# EAGLE board power supply1 (EAGLE 6.5.0)
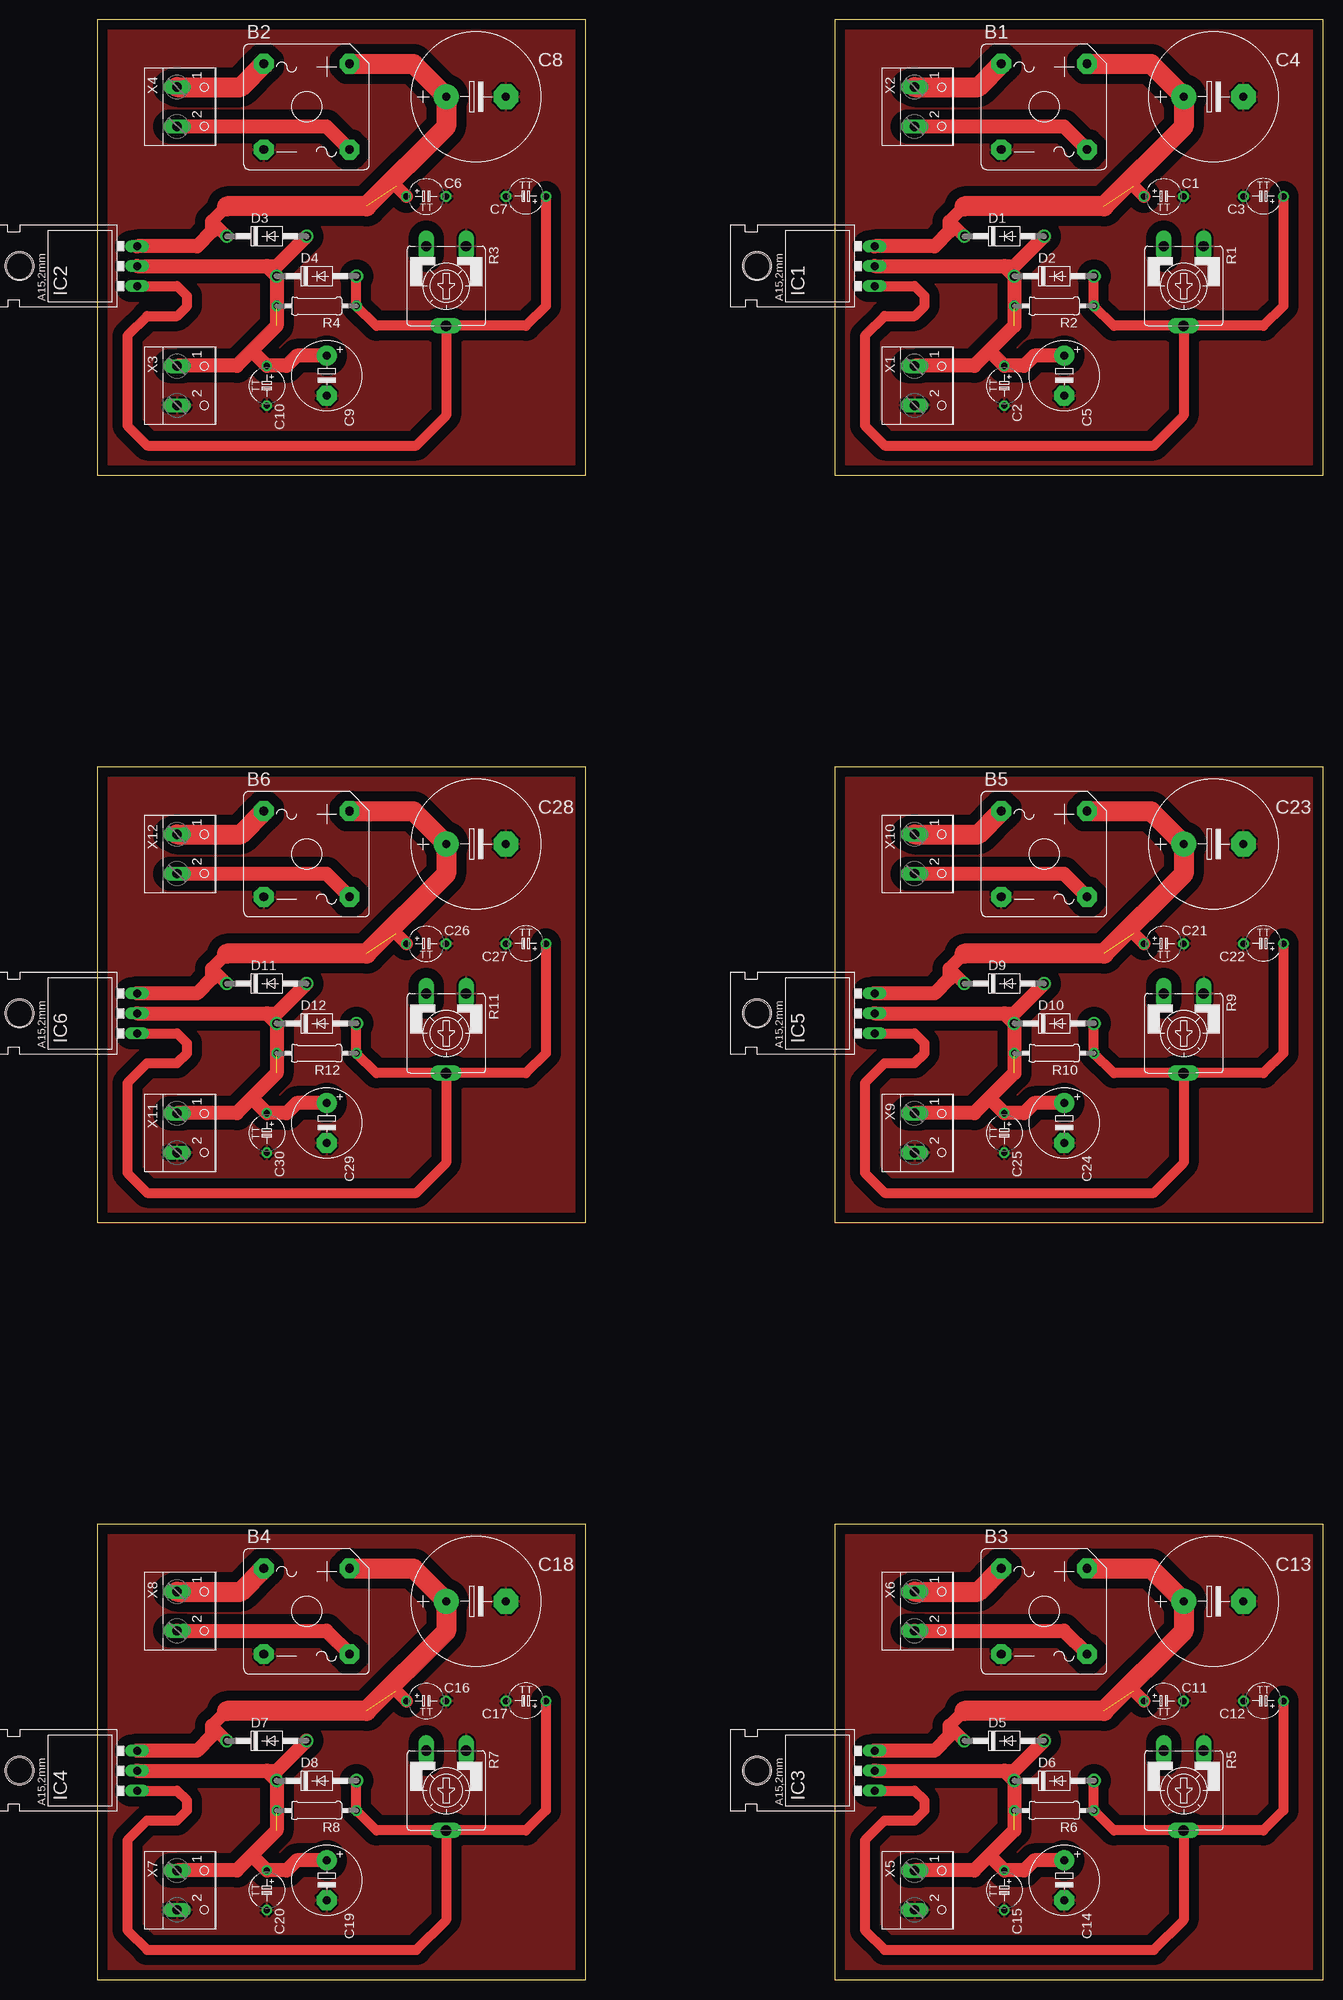
[diagram p0: board, top side]

Size 156.19 x 249.86 mm. Coordinates in mm from the lower left corner, seen from the top.
Outline: 93.98,191.77 156.19,191.77 156.19,249.86 93.98,249.86 93.98,191.77
Outline: 0,191.77 62.21,191.77 62.21,249.86 0,249.86 0,191.77
Outline: 93.98,0 156.19,0 156.19,58.09 93.98,58.09 93.98,0
Outline: 0,0 62.21,0 62.21,58.09 0,58.09 0,0
Outline: 93.98,96.52 156.19,96.52 156.19,154.61 93.98,154.61 93.98,96.52
Outline: 0,96.52 62.21,96.52 62.21,154.61 0,154.61 0,96.52
Copper layers (1*16): Top 0.035mm / dielectric 1.5mm / Bottom 0.035mm
Design rules "default": minimum track width 10mil, minimum drill 24mil, track to track 8mil, track to pad 8mil, pad to pad 8mil, via to via 8mil, smd to smd 8mil, copper to edge 40mil, drill to drill 8mil, minimum pad ring 10mil, minimum via ring 8mil, stop-mask expansion 4mil, vias tented up to drill 0mil, thermal gap 10mil

## Footprints (pad centres in the part's own frame; a part is rotated, then mirrored left to right if it is on the bottom)
GBPC1 = drill 1.118 pad 2.54 octagon: + 5.461,5.461; - -5.461,-5.461; AC1 -5.461,5.461; AC2 5.461,-5.461
TAP5-45 = drill 0.813: + -2.54,0 | drill 0.813 octagon: - 2.54,0
E7,5-16 = drill 1.016 pad 3.15: + -3.81,0 | drill 1.016 pad 3.15 octagon: - 3.81,0
E5-8,5 = drill 1.016 pad 2.54: + -2.54,0 | drill 1.016 pad 2.54 octagon: - 2.54,0
DO41-10 = drill 1.118: A 5.08,0; C -5.08,0
TO220L1 = drill 1.016 long: 1 -2.54,-3.81; 2 0,-3.81; 3 2.54,-3.81 | hole 3.302: 0,11.176
CA9V = drill 1.321 long: A -2.54,-5.08; E 2.54,-5.08; S 0,5.08
0207/10 = drill 0.813 octagon: 1 -5.08,0; 2 5.08,0
W237-102 = drill 1.194 long: 1 -2.5,-1.27; 2 2.5,-1.27

## Placement (x,y rotation side)
B1  [GBPC1]  120.65,238.76 0 top
B2  [GBPC1]  26.67,238.76 0 top
B3  [GBPC1]  120.65,46.99 0 top
B4  [GBPC1]  26.67,46.99 0 top
B5  [GBPC1]  120.65,143.51 0 top
B6  [GBPC1]  26.67,143.51 0 top
C1  0.1uF  [TAP5-45]  135.89,227.33 0 top
C2  0.1uF  [TAP5-45]  115.57,203.2 270 top
C3  0.1uF  [TAP5-45]  148.59,227.33 180 top
C4  [E7,5-16]  142.24,240.03 0 top
C5  [E5-8,5]  123.19,204.47 270 top
C6  0.1uF  [TAP5-45]  41.91,227.33 0 top
C7  0.1uF  [TAP5-45]  54.61,227.33 180 top
C8  [E7,5-16]  48.26,240.03 0 top
C9  [E5-8,5]  29.21,204.47 270 top
C10  0.1uF  [TAP5-45]  21.59,203.2 270 top
C11  0.1uF  [TAP5-45]  135.89,35.56 0 top
C12  0.1uF  [TAP5-45]  148.59,35.56 180 top
C13  [E7,5-16]  142.24,48.26 0 top
C14  [E5-8,5]  123.19,12.7 270 top
C15  0.1uF  [TAP5-45]  115.57,11.43 270 top
C16  0.1uF  [TAP5-45]  41.91,35.56 0 top
C17  0.1uF  [TAP5-45]  54.61,35.56 180 top
C18  [E7,5-16]  48.26,48.26 0 top
C19  [E5-8,5]  29.21,12.7 270 top
C20  0.1uF  [TAP5-45]  21.59,11.43 270 top
C21  0.1uF  [TAP5-45]  135.89,132.08 0 top
C22  0.1uF  [TAP5-45]  148.59,132.08 180 top
C23  [E7,5-16]  142.24,144.78 0 top
C24  [E5-8,5]  123.19,109.22 270 top
C25  0.1uF  [TAP5-45]  115.57,107.95 270 top
C26  0.1uF  [TAP5-45]  41.91,132.08 0 top
C27  0.1uF  [TAP5-45]  54.61,132.08 180 top
C28  [E7,5-16]  48.26,144.78 0 top
C29  [E5-8,5]  29.21,109.22 270 top
C30  0.1uF  [TAP5-45]  21.59,107.95 270 top
D1  1N4004  [DO41-10]  115.57,222.25 0 top
D2  1N4004  [DO41-10]  121.92,217.17 0 top
D3  1N4004  [DO41-10]  21.59,222.25 0 top
D4  1N4004  [DO41-10]  27.94,217.17 0 top
D5  1N4004  [DO41-10]  115.57,30.48 0 top
D6  1N4004  [DO41-10]  121.92,25.4 0 top
D7  1N4004  [DO41-10]  21.59,30.48 0 top
D8  1N4004  [DO41-10]  27.94,25.4 0 top
D9  1N4004  [DO41-10]  115.57,127 0 top
D10  1N4004  [DO41-10]  121.92,121.92 0 top
D11  1N4004  [DO41-10]  21.59,127 0 top
D12  1N4004  [DO41-10]  27.94,121.92 0 top
IC1  LM317MBT  [TO220L1]  95.25,218.44 90 top
IC2  LM317MBT  [TO220L1]  1.27,218.44 90 top
IC3  LM317MBT  [TO220L1]  95.25,26.67 90 top
IC4  LM317MBT  [TO220L1]  1.27,26.67 90 top
IC5  LM317MBT  [TO220L1]  95.25,123.19 90 top
IC6  LM317MBT  [TO220L1]  1.27,123.19 90 top
R1  [CA9V]  138.43,215.9 180 top
R2  120R  [0207/10]  121.92,213.36 180 top
R3  [CA9V]  44.45,215.9 180 top
R4  120R  [0207/10]  27.94,213.36 180 top
R5  [CA9V]  138.43,24.13 180 top
R6  120R  [0207/10]  121.92,21.59 180 top
R7  [CA9V]  44.45,24.13 180 top
R8  120R  [0207/10]  27.94,21.59 180 top
R9  [CA9V]  138.43,120.65 180 top
R10  120R  [0207/10]  121.92,118.11 180 top
R11  [CA9V]  44.45,120.65 180 top
R12  120R  [0207/10]  27.94,118.11 180 top
X1  [W237-102]  105.41,203.2 270 top
X2  [W237-102]  105.41,238.76 270 top
X3  [W237-102]  11.43,203.2 270 top
X4  [W237-102]  11.43,238.76 270 top
X5  [W237-102]  105.41,11.43 270 top
X6  [W237-102]  105.41,46.99 270 top
X7  [W237-102]  11.43,11.43 270 top
X8  [W237-102]  11.43,46.99 270 top
X9  [W237-102]  105.41,107.95 270 top
X10  [W237-102]  105.41,143.51 270 top
X11  [W237-102]  11.43,107.95 270 top
X12  [W237-102]  11.43,143.51 270 top

## Library data of the parts
B1-B6 = rectifier
C1-C30 R2 R4 R6 R8 R10 R12 = rcl
D1-D12 = diode
IC1-IC6 = v-reg
R1 R3 R5 R7 R9 R11 = pot
X1-X12 = con-wago-500; MPN: 237-102; OC_FARNELL: unknown; OC_NEWARK: 70K9898

## Nets
AGND: B1.- C1.- C2.- C3.- C4.- C5.- R1.A X1.2
AGND1: B2.- C6.- C7.- C8.- C9.- C10.- R3.A X3.2
AGND2: B3.- C11.- C12.- C13.- C14.- C15.- R5.A X5.2
AGND3: B4.- C16.- C17.- C18.- C19.- C20.- R7.A X7.2
AGND4: B5.- C21.- C22.- C23.- C24.- C25.- R9.A X9.2
AGND5: B6.- C26.- C27.- C28.- C29.- C30.- R11.A X11.2
N$1: B1.+ C1.+ C4.+ D1.C IC1.3
N$2: C2.+ C5.+ D1.A D2.C IC1.2 R2.2 X1.1
N$3: C3.+ D2.A IC1.1 R1.S R2.1
N$4: B2.+ C6.+ C8.+ D3.C IC2.3
N$5: C9.+ C10.+ D3.A D4.C IC2.2 R4.2 X3.1
N$6: B1.AC1 X2.1
N$7: B1.AC2 X2.2
N$8: C7.+ D4.A IC2.1 R3.S R4.1
N$9: B2.AC1 X4.1
N$10: B2.AC2 X4.2
N$11: B3.+ C11.+ C13.+ D5.C IC3.3
N$12: C14.+ C15.+ D5.A D6.C IC3.2 R6.2 X5.1
N$13: C12.+ D6.A IC3.1 R5.S R6.1
N$14: B3.AC1 X6.1
N$15: B3.AC2 X6.2
N$16: B4.+ C16.+ C18.+ D7.C IC4.3
N$17: C19.+ C20.+ D7.A D8.C IC4.2 R8.2 X7.1
N$18: C17.+ D8.A IC4.1 R7.S R8.1
N$19: B4.AC1 X8.1
N$20: B4.AC2 X8.2
N$21: B5.+ C21.+ C23.+ D9.C IC5.3
N$22: C24.+ C25.+ D9.A D10.C IC5.2 R10.2 X9.1
N$23: C22.+ D10.A IC5.1 R9.S R10.1
N$24: B5.AC1 X10.1
N$25: B5.AC2 X10.2
N$26: B6.+ C26.+ C28.+ D11.C IC6.3
N$27: C29.+ C30.+ D11.A D12.C IC6.2 R12.2 X11.1
N$28: C27.+ D12.A IC6.1 R11.S R12.1
N$29: B6.AC1 X12.1
N$30: B6.AC2 X12.2

## Tracks (layer width: path | path; a pad name or v marks a point on that pad's centre or on a via)
AGND
  pour Top (isolate 1.27): 93.98,250.19 156.21,250.19 156.21,191.77 93.98,191.77
AGND1
  pour Top (isolate 1.27): 0,250.19 62.23,250.19 62.23,191.77 0,191.77
AGND2
  pour Top (isolate 1.27): 93.98,58.42 156.21,58.42 156.21,0 93.98,0
AGND3
  pour Top (isolate 1.27): 0,58.42 62.23,58.42 62.23,0 0,0
AGND4
  pour Top (isolate 1.27): 93.98,154.94 156.21,154.94 156.21,96.52 93.98,96.52
AGND5
  pour Top (isolate 1.27): 0,154.94 62.23,154.94 62.23,96.52 0,96.52
N$1  (1 unrouted)
  Top 1.676: 110.49,226.06 108.59,224.15 D1.C | C1.+ 132.08,228.6
  Top 1.778: 108.59,224.15 108.59,222.88 106.68,220.98 IC1.3
  Top 2.54: B1.+ 134.24,244.22 C4.+ 138.43,236.22 128.27,226.06 110.49,226.06
N$2  (1 unrouted)
  Top 1.778: IC1.2 115.57,218.44 | 115.57,218.44 D2.C 116.84,210.82 113.67,207.64 | 113.67,207.64 111.76,205.74 104.18,205.74 X1.1 | C5.+ 119.38,207.01 118.11,205.74 C2.+ 113.67,207.64 | 115.57,218.44 116.84,218.44 D1.A
N$3
  Top 1.27: C3.+ 151.13,213.36 148.59,210.82 R1.S | R1.S 129.54,210.82 R2.1 D2.A | R1.S 138.43,199.39 134.62,195.58 100.33,195.58 97.79,198.12 97.79,209.55 100.33,212.09 104.14,212.09 105.41,213.36 105.41,214.63 104.14,215.9 IC1.1
N$4  (1 unrouted)
  Top 1.676: 16.51,226.06 14.61,224.15 D3.C | C6.+ 38.1,228.6
  Top 1.778: 14.61,224.15 14.61,222.88 12.7,220.98 IC2.3
  Top 2.54: B2.+ 40.26,244.22 C8.+ 44.45,236.22 34.29,226.06 16.51,226.06
N$5  (1 unrouted)
  Top 1.778: IC2.2 21.59,218.44 | 21.59,218.44 D4.C 22.86,210.82 19.69,207.64 | 19.69,207.64 17.78,205.74 10.2,205.74 X3.1 | C9.+ 25.4,207.01 24.13,205.74 C10.+ 19.69,207.64 | 21.59,218.44 22.86,218.44 D3.A
N$6
  Top 2.54: X2.1 112.23,241.26 B1.AC1
N$7
  Top 1.778: X2.2 123.15,236.26 B1.AC2
N$8
  Top 1.27: C7.+ 57.15,213.36 54.61,210.82 R3.S | R3.S 35.56,210.82 R4.1 D4.A | R3.S 44.45,199.39 40.64,195.58 6.35,195.58 3.81,198.12 3.81,209.55 6.35,212.09 10.16,212.09 11.43,213.36 11.43,214.63 10.16,215.9 IC2.1
N$9
  Top 2.54: X4.1 18.25,241.26 B2.AC1
N$10
  Top 1.778: X4.2 29.17,236.26 B2.AC2
N$11  (1 unrouted)
  Top 1.676: 110.49,34.29 108.59,32.38 D5.C | C11.+ 132.08,36.83
  Top 1.778: 108.59,32.38 108.59,31.11 106.68,29.21 IC3.3
  Top 2.54: B3.+ 134.24,52.45 C13.+ 138.43,44.45 128.27,34.29 110.49,34.29
N$12  (1 unrouted)
  Top 1.778: IC3.2 115.57,26.67 | 115.57,26.67 D6.C 116.84,19.05 113.67,15.88 | 113.67,15.88 111.76,13.97 104.18,13.97 X5.1 | C14.+ 119.38,15.24 118.11,13.97 C15.+ 113.67,15.88 | 115.57,26.67 116.84,26.67 D5.A
N$13
  Top 1.27: C12.+ 151.13,21.59 148.59,19.05 R5.S | R5.S 129.54,19.05 R6.1 D6.A | R5.S 138.43,7.62 134.62,3.81 100.33,3.81 97.79,6.35 97.79,17.78 100.33,20.32 104.14,20.32 105.41,21.59 105.41,22.86 104.14,24.13 IC3.1
N$14
  Top 2.54: X6.1 112.23,49.49 B3.AC1
N$15
  Top 1.778: X6.2 123.15,44.49 B3.AC2
N$16  (1 unrouted)
  Top 1.676: 16.51,34.29 14.61,32.38 D7.C | C16.+ 38.1,36.83
  Top 1.778: 14.61,32.38 14.61,31.11 12.7,29.21 IC4.3
  Top 2.54: B4.+ 40.26,52.45 C18.+ 44.45,44.45 34.29,34.29 16.51,34.29
N$17  (1 unrouted)
  Top 1.778: IC4.2 21.59,26.67 | 21.59,26.67 D8.C 22.86,19.05 19.69,15.88 | 19.69,15.88 17.78,13.97 10.2,13.97 X7.1 | C19.+ 25.4,15.24 24.13,13.97 C20.+ 19.69,15.88 | 21.59,26.67 22.86,26.67 D7.A
N$18
  Top 1.27: C17.+ 57.15,21.59 54.61,19.05 R7.S | R7.S 35.56,19.05 R8.1 D8.A | R7.S 44.45,7.62 40.64,3.81 6.35,3.81 3.81,6.35 3.81,17.78 6.35,20.32 10.16,20.32 11.43,21.59 11.43,22.86 10.16,24.13 IC4.1
N$19
  Top 2.54: X8.1 18.25,49.49 B4.AC1
N$20
  Top 1.778: X8.2 29.17,44.49 B4.AC2
N$21  (1 unrouted)
  Top 1.676: 110.49,130.81 108.59,128.91 D9.C | C21.+ 132.08,133.35
  Top 1.778: 108.59,128.91 108.59,127.63 106.68,125.73 IC5.3
  Top 2.54: B5.+ 134.24,148.97 C23.+ 138.43,140.97 128.27,130.81 110.49,130.81
N$22  (1 unrouted)
  Top 1.778: IC5.2 115.57,123.19 | 115.57,123.19 D10.C 116.84,115.57 113.67,112.39 | 113.67,112.39 111.76,110.49 104.18,110.49 X9.1 | C24.+ 119.38,111.76 118.11,110.49 C25.+ 113.67,112.39 | 115.57,123.19 116.84,123.19 D9.A
N$23
  Top 1.27: C22.+ 151.13,118.11 148.59,115.57 R9.S | R9.S 129.54,115.57 R10.1 D10.A | R9.S 138.43,104.14 134.62,100.33 100.33,100.33 97.79,102.87 97.79,114.3 100.33,116.84 104.14,116.84 105.41,118.11 105.41,119.38 104.14,120.65 IC5.1
N$24
  Top 2.54: X10.1 112.23,146.01 B5.AC1
N$25
  Top 1.778: X10.2 123.15,141.01 B5.AC2
N$26  (1 unrouted)
  Top 1.676: 16.51,130.81 14.61,128.91 D11.C | C26.+ 38.1,133.35
  Top 1.778: 14.61,128.91 14.61,127.63 12.7,125.73 IC6.3
  Top 2.54: B6.+ 40.26,148.97 C28.+ 44.45,140.97 34.29,130.81 16.51,130.81
N$27  (1 unrouted)
  Top 1.778: IC6.2 21.59,123.19 | 21.59,123.19 D12.C 22.86,115.57 19.69,112.39 | 19.69,112.39 17.78,110.49 10.2,110.49 X11.1 | C29.+ 25.4,111.76 24.13,110.49 C30.+ 19.69,112.39 | 21.59,123.19 22.86,123.19 D11.A
N$28
  Top 1.27: C27.+ 57.15,118.11 54.61,115.57 R11.S | R11.S 35.56,115.57 R12.1 D12.A | R11.S 44.45,104.14 40.64,100.33 6.35,100.33 3.81,102.87 3.81,114.3 6.35,116.84 10.16,116.84 11.43,118.11 11.43,119.38 10.16,120.65 IC6.1
N$29
  Top 2.54: X12.1 18.25,146.01 B6.AC1
N$30
  Top 1.778: X12.2 29.17,141.01 B6.AC2